# EAGLE board powerstage (EAGLE 9.2.2)
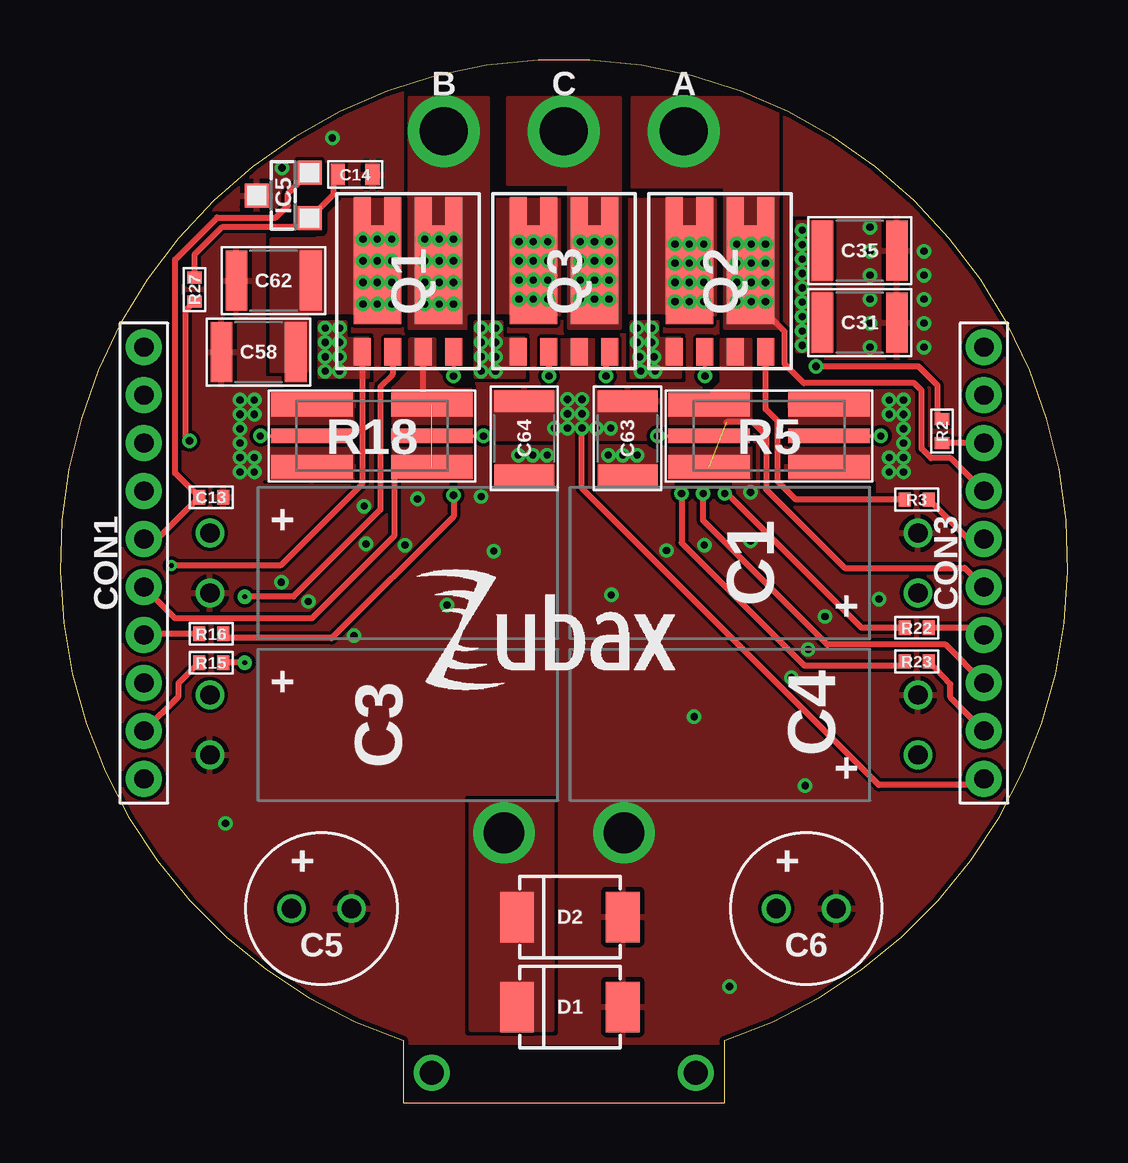
[diagram p0: board, top side]
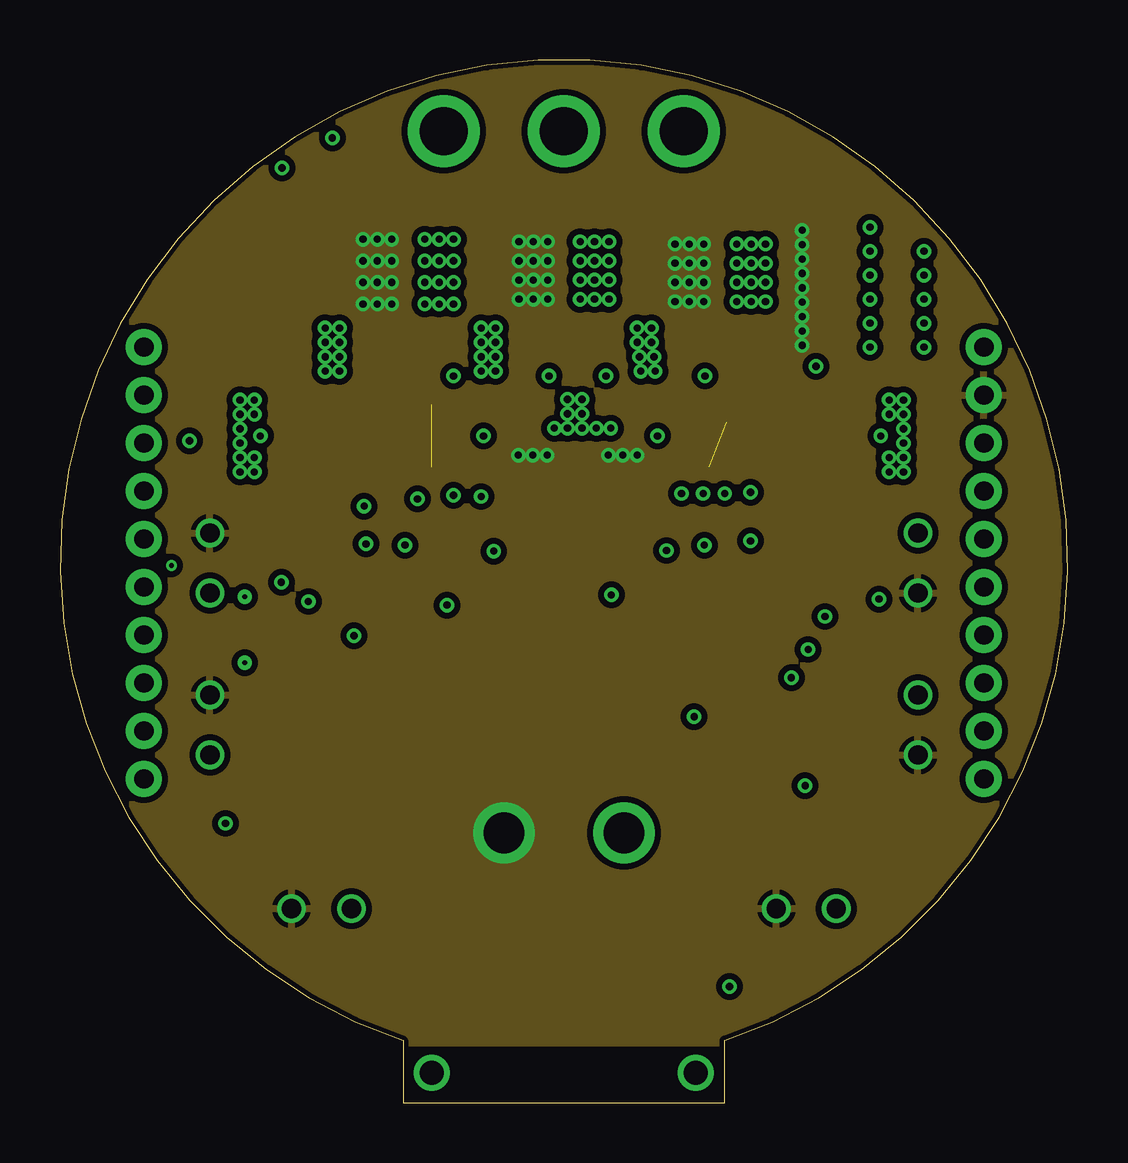
[diagram p1: board, inner layer Route2]
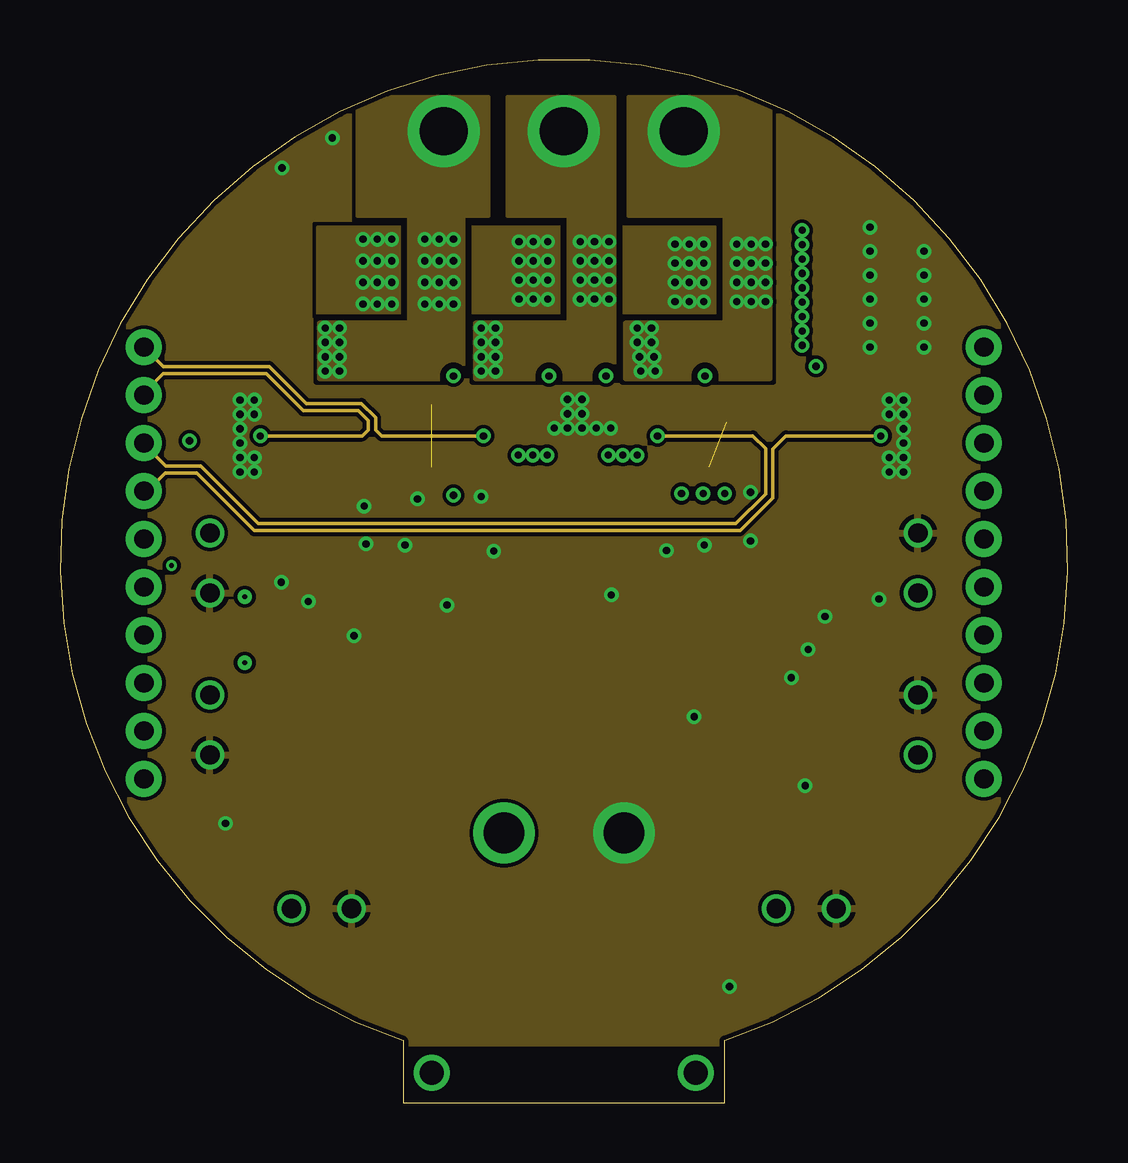
[diagram p2: board, inner layer Route15]
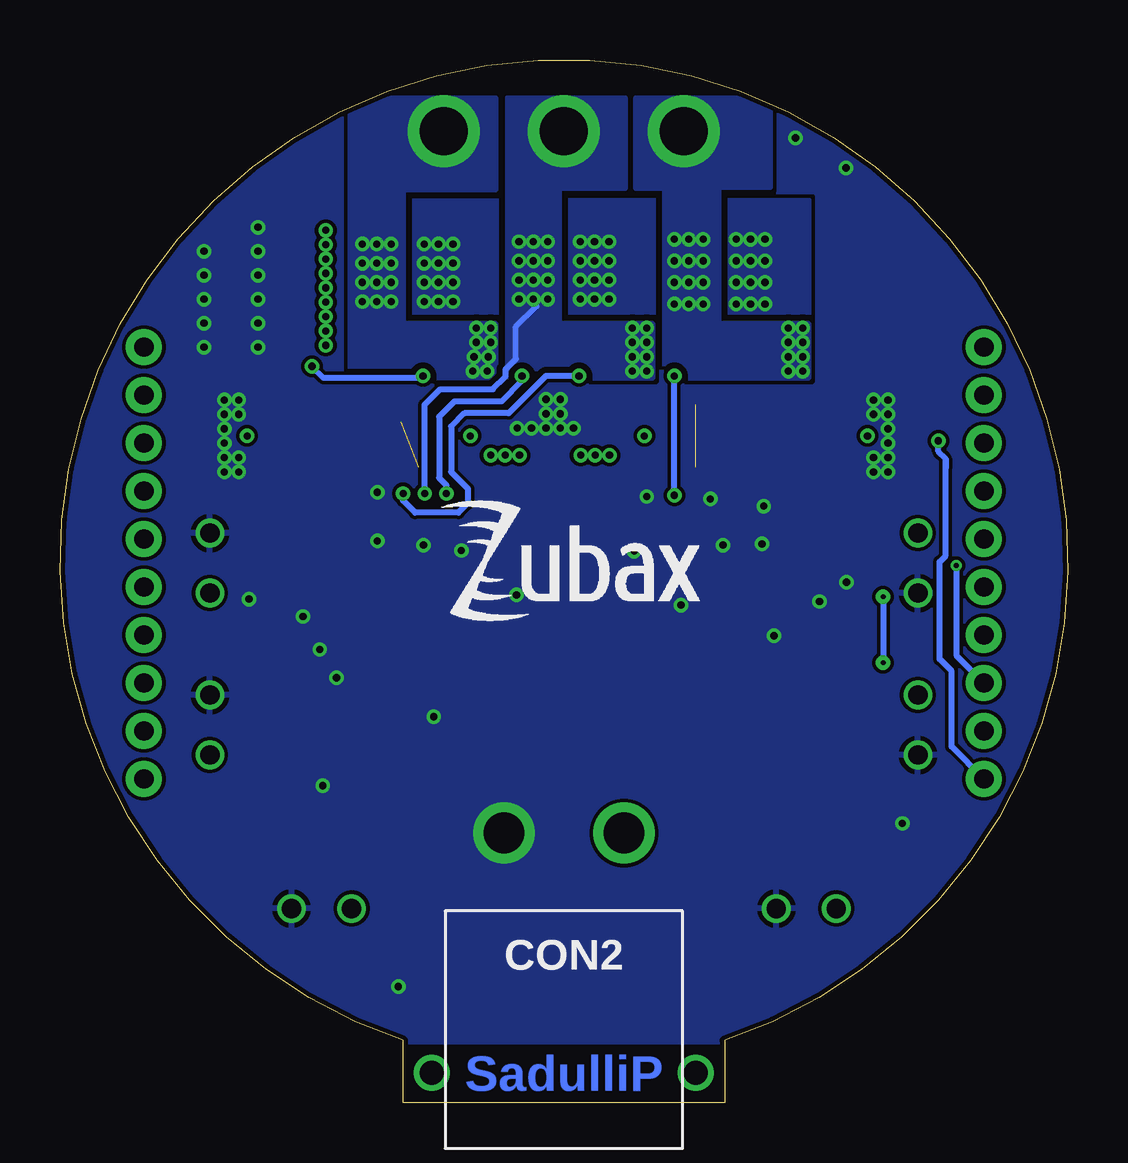
[diagram p3: board, bottom side, seen from below]

Size 41.99 x 43.47 mm. Coordinates in mm from the lower left corner, seen from the top.
Outline: 27.7,0 27.7,2.6 arc323 14.3,2.6 14.3,0 27.7,0
Copper layers (1*2*15*16): Top 0.035mm / dielectric 0.5mm / Route2 0.035mm / dielectric 0.5mm / Route15 0.035mm / dielectric 0.5mm / Bottom 0.035mm
Design rules "myxa": minimum track width 0.15mm, minimum drill 0.2mm, track to track 0.15mm, track to pad 0.15mm, pad to pad 0.15mm, via to via 0.15mm, smd to smd 0.15mm, copper to edge 0.2mm, drill to drill 0.2mm, minimum pad ring 0.125mm, minimum via ring 0.125mm, stop-mask expansion 1mil, vias tented up to drill 0.31mm, thermal gap 8mil
Net classes: 1 HV: clearance 0.25 mm to class 0, clearance 0.25 mm
tRestrict: 10 lines

## Footprints (pad centres in the part's own frame; a part is rotated, then mirrored left to right if it is on the bottom)
HOLE_2 = drill 2 pad 2.7: P$1 0,0
RADIAL_6.3X12.5-RA = drill 0.8: + -1.25,0; - 1.25,0
RADIAL_6.3X12.5 = drill 0.8: + -1.25,0; - 1.25,0
C0402 = smd 0.5 x 0.6: 1 -0.5,0; 2 0.5,0
C0603 = smd 0.6 x 0.9: P$1 -0.725,0; P$2 0.725,0
C1210 = smd 0.9 x 2.5: 1 -1.55,0; 2 1.55,0
1X10-PTH_2-FEMALE = drill 0.8 pad 1.5: 1 -9,0; 2 -7,0; 3 -5,0; 4 -3,0; 5 -1,0; 6 1,0; 7 3,0; 8 5,0; 9 7,0; 10 9,0
XT30-RA = drill 1.7: + -2.5,0; - 2.5,0 | drill 1: P$3 -5.5,10; P$4 5.5,10
SOD128 = smd 1.4 x 2.1: A -2.2,0; C 2.2,0
SOT23B-3 = smd 1 x 1: 1 -0.95,-1.1; 2 0.95,-1.1; 3 0,1.1
SOT-1205 = smd 1.15 x 0.7: 1 -2.95,1.905; 2 -2.95,0.635; 3 -2.95,-0.635; 4 -2.95,-1.905 | smd 1.9 x 0.7: 5 2.553,-1.905; 6 2.553,-0.635; 7 2.553,0.635; 8 2.553,1.905 | smd 4.1 x 1.97: EP-5-6 0.27,-1.27; EP-7-8 0.27,1.27
R0402 = smd 0.5 x 0.6: 1 -0.5,0; 2 0.5,0
R2512-KELVIN = smd 3.4 x 1: 1 -2.5,1.3; 2 2.5,1.3; 11 -2.5,-1.3; 22 2.5,-1.3 | smd 3.4 x 0.6: S1 -2.5,0; S2 2.5,0
SENSE-0.6 = smd 0.1 x 0.1: IN 0,0 | drill 0.3 pad 0.6: SHELL 0,0

## Placement (x,y rotation side)
A  PAD-HOLE_2  [HOLE_2]  26,40.5 0 top
B  PAD-HOLE_2  [HOLE_2]  16,40.5 0 top
C  PAD-HOLE_2  [HOLE_2]  21,40.5 0 top
C1  [RADIAL_6.3X12.5-RA]  35.75,22.5 90 top
C2  [RADIAL_6.3X12.5-RA]  6.25,22.5 270 top
C3  [RADIAL_6.3X12.5-RA]  6.25,15.75 270 top
C4  [RADIAL_6.3X12.5-RA]  35.75,15.75 90 top
C5  [RADIAL_6.3X12.5]  10.9,8.1 0 top
C6  [RADIAL_6.3X12.5]  31.1,8.1 0 top
C13  0.1µF  [C0402]  6.3,25.25 180 top
C14  4.7µF  [C0603]  12.3,38.7 180 top
C31  4.7µF  [C1210]  33.32,32.52 180 top
C35  4.7µF  [C1210]  33.32,35.52 180 top
C58  4.7µF  [C1210]  8.27,31.3 0 top
C62  4.7µF  [C1210]  8.9,34.27 0 top
C63  4.7µF  [C1210]  23.65,27.7 270 top
C64  4.7µF  [C1210]  19.35,27.7 270 top
CON1  PINHEAD_1X10-2-FEMALE  [1X10-PTH_2-FEMALE]  3.5,22.5 90 top
CON2  BATTERY_CON-2P-XT30-RA  [XT30-RA]  21,11.25 180 bottom
CON3  PINHEAD_1X10-2-FEMALE  [1X10-PTH_2-FEMALE]  38.5,22.5 90 top
D1  PTVS36VP1UP,115-36V-SOD128  [SOD128]  21.25,4 180 top
D2  PTVS36VP1UP,115-36V-SOD128  [SOD128]  21.25,7.75 180 top
IC5  MCP9700  [SOT23B-3]  9.3,37.83 90 top
Q1  BUK7K6R2-40EX  [SOT-1205]  14.5,34.25 90 top
Q2  BUK7K6R2-40EX  [SOT-1205]  27.5,34.25 90 top
Q3  BUK7K6R2-40EX  [SOT-1205]  21,34.25 90 top
R2  4R3  [R0402]  36.75,28 90 top
R3  4R3  [R0402]  35.7,25.15 180 top
R5  1 mOhms  [R2512-KELVIN]  29.55,27.8 0 top
R15  4R3  [R0402]  6.3,18.35 0 top
R16  4R3  [R0402]  6.3,19.55 0 top
R18  1 mOhms  [R2512-KELVIN]  13,27.8 180 top
R22  4R3  [R0402]  35.7,19.8 180 top
R23  4R3  [R0402]  35.7,18.4 180 top
R27  200R  [R0402]  5.6,33.9 270 top
S1  SENSE  [SENSE-0.6]  21.75,28.12 90 top
U$1  [ZUBAX_LOGO_5X10]  26.2,19.9 0 bottom
U$13  [ZUBAX_LOGO_5X10]  14.77,17.02 0 top

## Library data of the parts
A B C = PADS; BOM: EXCLUDE
C1-C6 = rc; PACKAGE: RADIAL_6.3x12.5
C13 = C_digikey; DIGIKEY#: 490-3261-1-ND; MANF: Murata Electronics North America; MANF#: GRM155R71C104KA88D; OPERATING_TEMP: -55°C ~ 125°C; PACKAGE: 0402; TC: X7R; TOLERANCE: +-10%; VOLTAGE: 16V
C14 = C_digikey; DIGIKEY#: 490-7199-1-ND; MANF: Murata Electronics North America; MANF#: GRM188C81E475KE11D; OPERATING_TEMP: -55°C ~ 105°C; PACKAGE: 0603; TC: X6S; TOLERANCE: +-10%; VOLTAGE: 25V
C31 C35 C58 C62-C64 = myxa_masterlib; DIGIKEY#: 445-6043-1-ND; MANF: TDK Corporation; MANF#: C3225X7S2A475M200AB; OPERATING_TEMP: -55°C ~ 125°C; PACKAGE: 1210; TC: X7S; TOLERANCE: +-20%; VOLTAGE: 100V
CON1 CON3 = pinhead
CON2 = Connectors; LINK: https://www.tme.eu/en/details/xt30pw-m/dc-power-connectors/amass/; MANF: AMASS; MANF#: XT30PW-M
D1 D2 = TVS_diodes; DIGIKEY#: 1727-4439-2-ND; MANF: Nexperia USA Inc; MANF#: PTVS36VP1UP,115
IC5 = myxa_masterlib; DIGIKEY#: MCP9700T-E/TTTR-ND; MANF: Microchip Technology; MANF#: MCP9700T-E/TT
Q1-Q3 = mosfet; DIGIKEY#: 568-11626-1-ND; MANF: NXP Semiconductors; MANF#: BUK7K6R2-40EX; PACKAGE: 56LFPAK
R2 R3 R15 R16 R22 R23 = R_digikey; DIGIKEY#: 311-4.3JRCT-ND; MANF: Yageo; MANF#: RC0402JR-074R3L; PACKAGE: 0402; TOLERANCE: 5%
R5 R18 = SHUNT_RESISTORS; DIGIKEY#: CSNL2512FT1L00TR-ND; MANF: Stackpole Electronics Inc.; MANF#: CSNL2512FT1L00; POWER: 2W; TC: ±50ppm/°C; TOLERANCE: ±1%
R27 = R_digikey; DIGIKEY#: 311-200LRCT-ND; MANF: Yageo; MANF#: RC0402FR-07200RL; PACKAGE: 0402; TOLERANCE: 1%
S1 = misc; BOM: EXCLUDE
U$1 U$13 = pixhawk_esc_1.5_master_lib

## Nets
GND: CON3.10
N$1 [HV]: Q2.2 R2.2
N$2: Q2.4 R3.2
N$3: Q1.2 R15.2
N$4: Q1.4 R16.2
N$10: C14.P$2 IC5.1 R27.1
N$12 [HV]: Q3.2 R22.2
N$13: Q3.4 R23.2
PGND: C1.- C2.- C3.- C4.- C5.- C6.- C13.1 C14.P$1 C31.1 C35.1 C58.1 C62.1 C63.1 C64.1 CON2.- D1.A D2.A IC5.3 Q3.3 R5.2 R5.22 R18.2 R18.22 S1.SHELL
PHASE_A [HV]: A.P$1 CON3.7 Q2.1 Q2.5 Q2.6 Q2.EP-5-6
PHASE_A_CURRENT_SHUNT_N: CON1.8 R5.S1
PHASE_A_CURRENT_SHUNT_P: CON1.7 R5.S2
PHASE_A_GATE_HIGH [HV]: CON3.8 R2.1
PHASE_A_GATE_LOW: CON3.6 R3.1
PHASE_A_GND: CON3.5 Q2.3 R5.1 R5.11
PHASE_B [HV]: B.P$1 CON1.3 Q1.1 Q1.5 Q1.6 Q1.EP-5-6
PHASE_B_CURRENT_SHUNT_N: CON1.10 R18.S1
PHASE_B_CURRENT_SHUNT_P: CON1.9 R18.S2
PHASE_B_GATE_HIGH [HV]: CON1.2 R15.1
PHASE_B_GATE_LOW: CON1.4 R16.1
PHASE_B_GND: CON1.5 Q1.3 R18.1 R18.11
PHASE_C [HV]: C.P$1 CON3.3 Q3.1 Q3.5 Q3.6 Q3.EP-5-6
PHASE_C_GATE_HIGH [HV]: CON3.4 R22.1
PHASE_C_GATE_LOW: CON3.2 R23.1
PHASE_C_GND: CON3.1 S1.IN
TEMPERATURE_SENSOR: C13.2 CON1.6 IC5.2
VDC [HV]: C1.+ C2.+ C3.+ C4.+ C5.+ C6.+ C31.2 C35.2 C58.2 C62.2 C63.2 C64.2 CON2.+ CON3.9 D1.C D2.C Q1.7 Q1.8 Q1.EP-7-8 Q2.7 Q2.8 Q2.EP-7-8 Q3.7 Q3.8 Q3.EP-7-8
VDD_5V: CON1.1 R27.2

## Tracks (layer width: path | path; a pad name or v marks a point on that pad's centre or on a via)
N$1  (via drill 0.3 pad 0.6)
  Top 0.152: Q2.2 26.86,30.31 v26.87,30.3
  Top 0.25: R2.2 36.57,28.68 36.57,29.9 35.77,30.7 v31.5,30.7
  Bottom 0.25: v26.87,30.3 26.95,30.23 31.02,30.23 v31.5,30.7
N$2
  Top 0.25: R3.2 30.65,25.15 29.9,25.9 29.9,28.43 29.4,28.92 Q2.4
N$3  (via drill 0.2 pad 0.6)
  Top 0.25: Q1.2 13.86,30.37 13.35,29.85 13.35,24.73 9.72,21.1 v7.7,21.1 | v7.7,18.35 R15.2
  Bottom 0.25: v7.7,21.1 v7.7,18.35
N$4  (via drill 0.3 pad 0.6)
  Top 0.152: Q1.4 v16.4,30.3
  Top 0.25: v16.4,25.32 16.4,24.45 11.32,19.38 6.97,19.38 R16.2
  Bottom 0.25: v16.4,25.32 v16.4,30.3
N$10
  Top 0.25: C14.P$2 11.4,38.52 11.4,37.88 IC5.1 10.4,36.5 6.75,36.5 5.6,35.35 R27.1
N$12  (via drill 0.3 pad 0.6)
  Top 0.25: R22.2 33.4,19.8 27.8,25.4 v27.7,25.4 | Q3.2 20.37,31.29 v20.37,30.3
  Bottom 0.25: v20.37,30.3 21.75,30.3 23.3,28.75 25.15,28.75 25.7,28.2 25.7,26.3 25,25.6 25,25 25.4,24.6 27.2,24.6 27.7,25.1 v27.7,25.4
N$13  (via drill 0.3 pad 0.6)
  Top 0.15: Q3.4 22.83,31.23
  Top 0.25: v25.9,25.4 25.9,23.34 31.02,18.23 35.02,18.23 R23.2 | Q3.4 22.75,31.14 v22.75,30.3
  Bottom 0.25: v25.9,25.4 25.9,25.75 26.2,26.05 26.2,28.6 25.55,29.25 23.6,29.25 22.75,30.1 v22.75,30.3
PGND  (via drill 0.3 pad 0.6)
  other vias: 34.55,29.3 34.55,28.7 34.55,26.9 34.55,26.3 35.15,29.3 35.15,28.7 35.15,28.1 35.15,27.5 35.15,26.9 35.15,26.3 8.1,26.3 8.1,26.9 8.1,28.7 8.1,29.3 7.5,26.3 7.5,26.9 7.5,27.5 7.5,28.1 7.5,28.7 7.5,29.3 21.15,29.32 21.75,29.32 21.15,28.73 21.75,28.73 21.15,28.12 20.6,28.12 22.35,28.12 22.95,28.12 9.25,38.98 11.35,40.23 33.75,36.5 33.75,35.5 33.75,34.5 33.75,33.5 33.75,32.5 33.75,31.5 36,35.5 36,34.5 36,33.5 36,32.5 36,31.5 14.9,25.18 10.35,20.9 12.25,19.48 28.77,23.43 31.87,20.27 34.12,21 28.77,25.45 25.27,23.02 30.47,17.73 26.85,23.25 31.17,18.9 16.12,20.75 26.42,16.1 6.9,11.65 27.9,4.85 31.05,13.22 22.97,21.18 18.07,23 17.55,25.27 9.22,21.7 12.67,24.88 12.75,23.3 14.37,23.25
  pour Bottom (rank 5): 21,43.5 0,43.5 0,2.5 42,2.5 42,43.5
  pour Top (no thermals): 30.42,29.6 35.37,29.6 35.37,26 30.42,26
  pour Top (no thermals): 12.2,26 7.27,26 7.27,29.6 12.2,29.6
  pour Top (no thermals): 22.3,31.8 20.92,31.8 20.92,29.65 17.7,29.65 17.7,27.95 24.85,27.95 24.85,29.65 22.3,29.65
  pour Top (rank 5): 21,43.5 42,43.5 42,2.5 0,2.5 0,43.5
  pour Route15 (rank 5): 0,43.5 0,2.5 42,2.5 42,43.5
PHASE_A  (via drill 0.3 pad 0.6)
  Top 0.152: Q2.1 25.59,31.7
  Top 0.25: CON3.7 37.12,26.88 36.29,26.88 35.9,27.27 35.9,29.7 35.6,30 30.99,30 30.2,30.8 30.2,32.15 28.77,33.58 Q2.EP-5-6
  other vias: 24.65,32.3 24.65,31.7 24.75,31.1 24.15,31.1 24.05,31.7 24.05,32.3 24.8,30.5 24.2,30.5 28.2,35.8 28.8,35.8 29.4,35.8 28.2,35 28.8,35 29.4,35 28.2,34.2 28.8,34.2 29.4,34.2 28.2,33.4 28.8,33.4 29.4,33.4
  pour Top (no thermals): 27.7,32.3 27.7,38.2 23.85,38.2 23.85,41.9 29.9,41.9 29.9,32.3
  pour Top (no thermals): 25.85,31.85 24.9,31.85 24.9,32.55 23.8,32.55 23.8,30.25 25.85,30.25
  pour Bottom (no thermals): 23.85,32.5 23.85,30.2 29.9,30.2 29.9,41.9 23.85,41.9 23.85,38.05 27.7,38.05 27.7,32.5
  pour Route15 (no thermals): 23.55,32.5 23.55,30.2 29.6,30.2 29.6,41.9 23.7,41.9 23.7,37 27.7,37 27.7,32.5
PHASE_A_CURRENT_SHUNT_N  (via drill 0.3 pad 0.6)
  Top 0.15: R5.S1 v24.9,27.8
  Route15 0.15: v24.9,27.8 28.87,27.8 29.4,27.27 29.4,25.39 28.16,24.15 8.26,24.15 5.86,26.55 4.4,26.55 3.5,27.45 CON1.8
PHASE_A_CURRENT_SHUNT_P  (via drill 0.3 pad 0.6)
  Top 0.15: R5.S2 v34.2,27.8
  Route15 0.15: v34.2,27.8 30.25,27.8 29.7,27.25 29.7,25.21 28.33,23.85 8.09,23.85 5.69,26.24 4.39,26.24 3.65,25.5 CON1.7
PHASE_A_GATE_HIGH
  Top 0.25: CON3.8 R2.1
PHASE_A_GATE_LOW
  Top 0.25: CON3.6 37.85,23.5 R3.1
PHASE_A_GND  (1 unrouted)
  Top 0.25: CON3.5 37.7,22.3 32.7,22.3 29.42,25.57 29.42,27.81 28.86,28.38 27.77,28.38
  pour Top (no thermals): 28.77,31.82 27.55,31.82 27.55,30.02 27.05,29.52 25.42,29.52 25.42,26.07 28.77,26.07
PHASE_B  (via drill 0.2, 0.3 pad 0.6)
  Top 0.25: Q1.1 12.59,25.8 9.2,22.4 v4.65,22.4
  Bottom 0.25: v4.65,22.4 4.65,18.65 CON1.3
  other vias: 11.65,32.3 11.65,31.7 11.65,31.1 11.05,31.1 11.05,31.7 11.05,32.3 11.65,30.5 11.05,30.5 15.2,36 15.8,36 16.4,36 15.2,35.1 15.8,35.1 16.4,35.1 15.2,34.2 15.8,34.2 16.4,34.2 15.2,33.3 15.8,33.3 16.4,33.3
  pour Top (rank 2, no thermals): 14.55,32.3 14.55,41.9 17.85,41.9 17.85,32.3
  pour Top (no thermals): 12.85,31.85 11.9,31.85 11.9,32.55 10.8,32.55 10.8,30.25 12.85,30.25
  pour Bottom (no thermals): 10.8,32.5 10.8,30.2 16.8,30.2 16.8,38.1 18,38.1 18,41.9 12.4,41.9 12.4,38.15 14.55,38.15 14.55,32.5
  pour Route15 (no thermals): 10.8,32.5 10.8,30.2 16.8,30.2 16.8,37 17.85,37 17.85,41.9 12.4,41.9 12.4,37 14.55,37 14.55,32.5
PHASE_B_CURRENT_SHUNT_N  (via drill 0.3 pad 0.6)
  Top 0.15: R18.S1 v17.65,27.8
  Route15 0.15: v17.65,27.8 13.4,27.8 13.15,28.05 13.15,28.56 12.56,29.15 10.26,29.15 8.71,30.7 4.3,30.7 CON1.10
PHASE_B_CURRENT_SHUNT_P  (via drill 0.3 pad 0.6)
  Top 0.15: R18.S2 v8.35,27.8
  Route15 0.15: v8.35,27.8 12.6,27.8 12.85,28.05 12.85,28.44 12.44,28.85 10.14,28.85 8.59,30.4 4.3,30.4 3.5,29.6 CON1.9
PHASE_B_GATE_HIGH
  Top 0.25: CON1.2 4.95,16.95 4.95,17.5 R15.1
PHASE_B_GATE_LOW
  Top 0.25: R16.1 3.55,19.55 CON1.4
PHASE_B_GND  (1 unrouted)
  Top 0.25: R18.11 15.13,29.46 Q1.3 | R18.1 14.37,26.5 13.92,26.05 13.92,23.62 10.5,20.2 4.8,20.2 CON1.5
  pour Top (no thermals): 15.6,31.8 14.6,31.8 14.6,30.48 13.9,29.77 13.9,26.1 17.1,26.1 17.1,29.7 16.4,29.7 15.6,30.5
PHASE_C  (via drill 0.3 pad 0.6)
  Top 0.25: CON3.3 36.9,19.1 31.97,19.1 26.8,24.27 v26.8,25.4
  Bottom 0.25: v26.8,25.4 26.8,29.1 26.15,29.75 23.95,29.75 23.42,30.28 23.42,30.58 23,31.01 23,32.35 22.15,33.2 22.27,33.33 v22.27,33.5
  other vias: 21.67,35.9 22.27,35.9 22.87,35.9 21.67,35.1 22.27,35.1 22.87,35.1 21.67,34.3 22.27,34.3 22.87,34.3 21.67,33.5 18.15,32.3 18.15,31.7 18.15,31.1 17.55,31.1 17.55,31.7 17.55,32.3 18.15,30.5 17.55,30.5 22.87,33.5
  pour Top (no thermals): 21.2,32.3 21.2,38.3 18.65,38.3 18.65,41.9 23.35,41.9 23.35,32.3
  pour Top (no thermals): 19.35,31.85 18.4,31.85 18.4,32.55 17.3,32.55 17.3,30.25 19.35,30.25
  pour Bottom (no thermals): 17.3,32.5 17.3,30.2 23.35,30.2 23.35,41.9 18.45,41.9 18.45,38.1 21.2,38.1 21.2,32.5
  pour Route15 (no thermals): 17.3,32.5 17.3,30.2 23.1,30.2 23.1,41.9 18.65,41.9 18.65,37 21.2,37 21.2,32.5
PHASE_C_GATE_HIGH
  Top 0.25: CON3.4 38.2,19.8 R22.1
PHASE_C_GATE_LOW
  Top 0.25: CON3.2 37.1,16.9 37.1,17.45 R23.1
PHASE_C_GND
  Top 0.25: CON3.1 38.25,13.25 34.12,13.25 21.75,25.62 S1.IN
TEMPERATURE_SENSOR
  Top 0.25: CON1.6 4.05,23.5 C13.2 4.8,26.25 4.8,35.15 6.55,36.9 9,36.9 9.5,37.4 9.5,37.9 10.37,38.77 IC5.2
VDC  (via drill 0.3 pad 0.6)
  Top 0.15: Q3.EP-7-8 v19.73,34.3 v19.72,34.3
  other vias: 12.62,36 13.22,36 13.82,36 12.62,35.1 13.22,35.1 13.82,35.1 12.62,34.2 13.22,34.2 13.82,34.2 12.62,33.3 13.22,33.3 13.82,33.3 19.12,35.9 19.72,35.9 20.32,35.9 19.12,35.1 19.72,35.1 20.32,35.1 19.12,34.3 20.32,34.3 19.12,33.5 19.72,33.5 20.32,33.5 25.62,35.8 26.22,35.8 26.82,35.8 25.62,35 26.22,35 26.82,35 25.62,34.2 26.22,34.2 26.82,34.2 25.62,33.4 26.22,33.4 26.82,33.4 30.92,36.38 30.92,35.77 30.92,35.17 30.92,34.58 30.92,33.98 30.92,33.38 30.92,32.77 30.92,32.17 30.92,31.57 19.1,27 19.7,27 20.3,27 22.85,27 23.45,27 24.05,27
  pour Bottom (rank 3): 27.3,37.65 10.75,37.65 10.75,32.85 27.3,32.85
  pour Top (no thermals): 32.12,36.73 30.72,36.73 30.72,31.32 32.12,31.32
  pour Route2: 0,43.5 0,2.5 42,2.5 42,43.5
  pour Top (no thermals): 18.2,27.35 18.2,25.75 20.52,25.75 20.52,27.35
  pour Top (no thermals): 22.47,27.38 22.47,25.77 24.82,25.77 24.82,27.38
  pour Top (no thermals): 20.47,3.07 17.15,3.07 17.15,12.55 20.47,12.55
  pour Top (rank 2, no thermals): 13.9,36 8.8,36 8.8,30.5 10.3,30.5 10.3,33 13.9,33
  pour Route15 (rank 3): 27.3,36.5 10.75,36.5 10.75,32.85 27.3,32.85
  pour Top (rank 3, no thermals): 27.3,37.65 10.75,37.65 10.75,32.85 27.3,32.85
VDD_5V  (via drill 0.3 pad 0.6)
  Top 0.25: v5.4,27.6 5.25,27.75 5.25,33.05 R27.2
  Bottom 0.25: CON1.1 4.85,14.85 4.85,18 5.35,18.5 5.35,22.55 5.1,22.8 5.1,26.6 | 5.1,26.6 5.1,26.85 | 5.1,26.85 5.1,26.6 | 5.1,26.6 5.1,26.45 | 5.1,26.85 5.4,27.15 v5.4,27.6

## Text on the board
Bottom: SadulliP